# EAGLE board DRV8825_SHIELD_V1 (EAGLE 9.6.2)
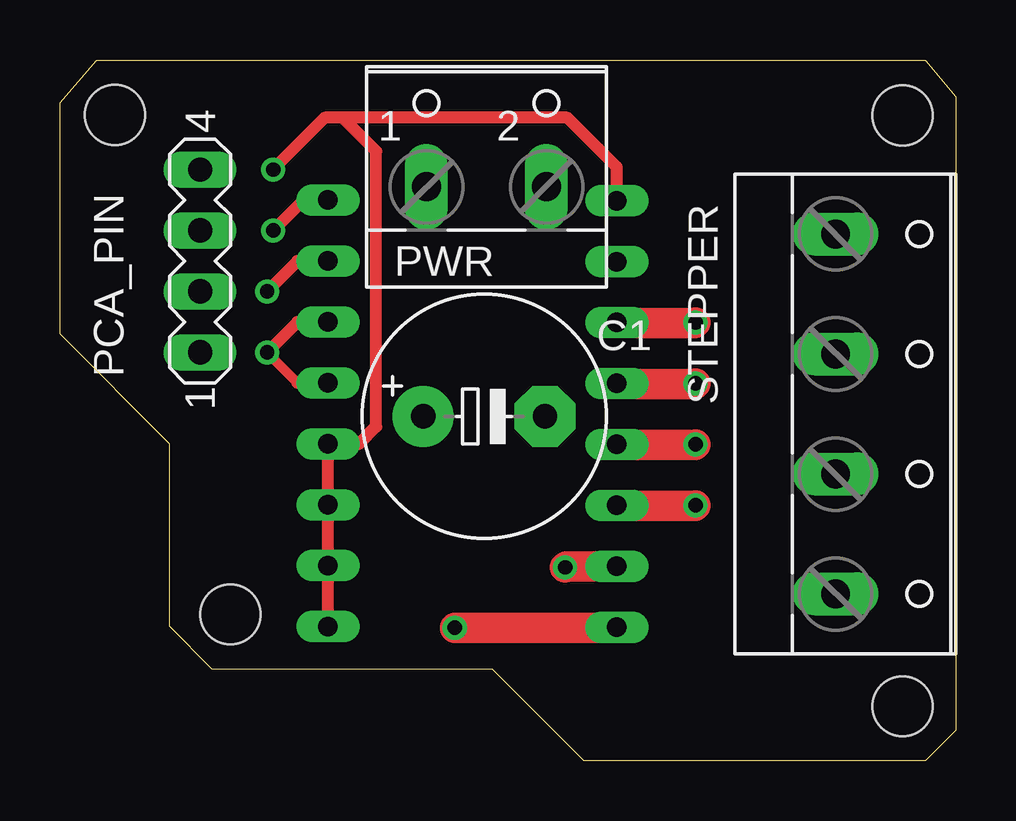
[diagram p0: board, top side]
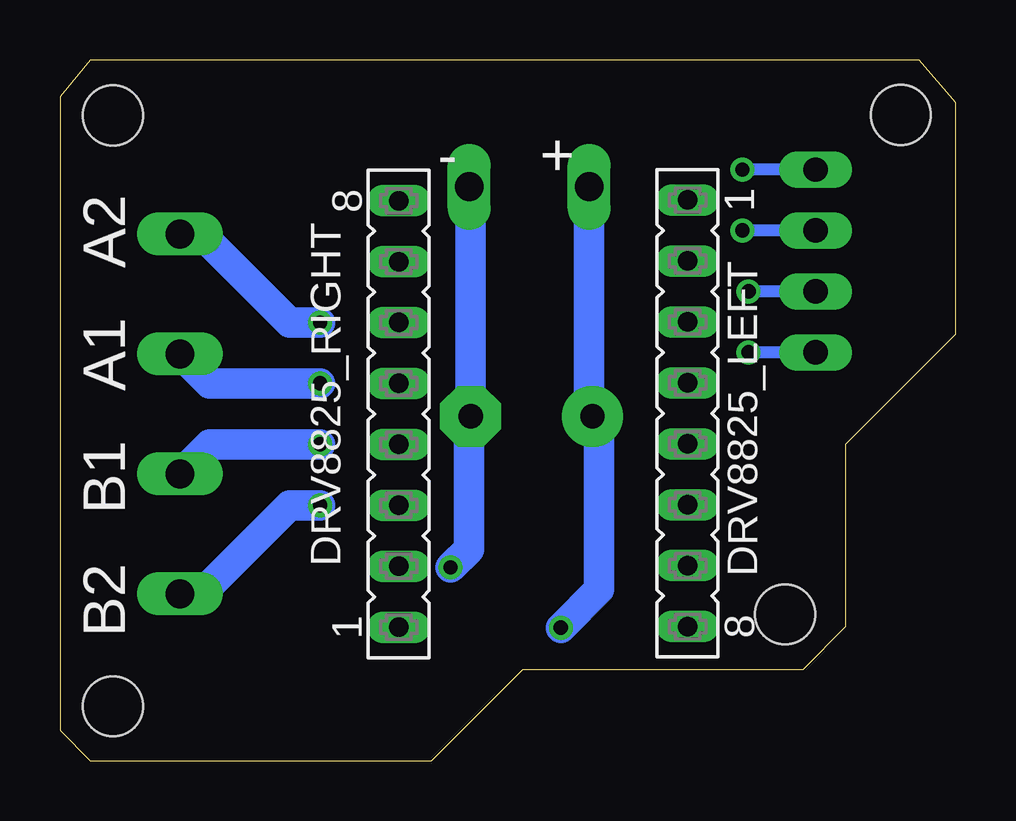
[diagram p1: board, bottom side, seen from below]

Size 37.34 x 29.21 mm. Coordinates in mm from the lower left corner, seen from the top.
Outline: 36.07,0 21.84,0 18.03,3.81 6.35,3.81 4.57,5.59 4.57,13.21 0,17.78 0,27.43 1.52,29.21 36.07,29.21 37.34,27.69 37.34,1.27 36.07,0
Copper layers (1*16): Top 0.035mm / dielectric 1.5mm / Bottom 0.035mm
Design rules "default": minimum track width 6mil, minimum drill 0.35mm, track to track 6mil, track to pad 6mil, pad to pad 6mil, via to via 6mil, smd to smd 6mil, copper to edge 40mil, drill to drill 6mil, minimum pad ring 10mil, minimum via ring 8mil, stop-mask expansion 4mil, vias tented up to drill 0mil, thermal gap 10mil
Holes 2.5 mm at 35.13,26.9 2.29,26.92 7.11,6.1 35.13,2.26

## Footprints (pad centres in the part's own frame; a part is rotated, then mirrored left to right if it is on the bottom)
E5-10,5 = drill 1.016 pad 2.54: + -2.54,0 | drill 1.016 pad 2.54 octagon: - 2.54,0
FE08 = drill 0.813 long: 1 -8.89,0; 2 -6.35,0; 3 -3.81,0; 4 -1.27,0; 5 1.27,0; 6 3.81,0; 7 6.35,0; 8 8.89,0
MA04-1 = drill 1.016 long: 1 -3.81,0; 2 -1.27,0; 3 1.27,0; 4 3.81,0
W237-102 = drill 1.194 long: 1 -2.5,-1.27; 2 2.5,-1.27
W237-4 = drill 1.194 long: 1 -7.5,-1.27; 2 -2.5,-1.27; 3 2.5,-1.27; 4 7.5,-1.27

## Placement (x,y rotation side)
C1  100uF-63V  [E5-10,5]  17.68,14.35 0 top
DRV8825_LEFT  [FE08]  11.18,14.48 270 bottom
DRV8825_RIGHT  [FE08]  23.22,14.45 90 bottom
PCA_PIN  [MA04-1]  5.84,20.83 90 top
PWR  [W237-102]  17.78,25.2 0 top
STEPPER  [W237-4]  33.6,14.45 270 top

## Library data of the parts
C1 = rcl; SPICEPREFIX: C
DRV8825_LEFT DRV8825_RIGHT = con-lsta; OC_FARNELL: unknown; OC_NEWARK: unknown
PCA_PIN = con-lstb; OC_FARNELL: unknown; OC_NEWARK: unknown
PWR = con-wago-500; MPN: 237-102; OC_FARNELL: unknown; OC_NEWARK: 70K9898
STEPPER = con-wago-500; OC_FARNELL: unknown; OC_NEWARK: unknown

## Nets
N$1: DRV8825_RIGHT.3 STEPPER.4
N$2: DRV8825_RIGHT.4 STEPPER.3
N$3: DRV8825_LEFT.2 PCA_PIN.2
N$4: DRV8825_LEFT.1 PCA_PIN.3
N$5: C1.+ DRV8825_RIGHT.1 PWR.1
N$6: C1.- DRV8825_RIGHT.2 PWR.2
N$8: DRV8825_LEFT.3 DRV8825_LEFT.4 PCA_PIN.1
N$9: DRV8825_RIGHT.5 STEPPER.2
N$10: DRV8825_RIGHT.6 STEPPER.1
N$11: DRV8825_LEFT.5 DRV8825_LEFT.6 DRV8825_LEFT.7 DRV8825_LEFT.8 DRV8825_RIGHT.8 PCA_PIN.4

## Tracks (layer width: path | path; a pad name or v marks a point on that pad's centre or on a via)
N$1  (via drill 0.6)
  Top 1.27: v26.49,10.64 26.47,10.62 23.24,10.62 DRV8825_RIGHT.3
  Bottom 1.27: STEPPER.4 31.45,6.95 27.76,10.64 v26.49,10.64
N$2  (via drill 0.6)
  Top 1.27: v26.49,13.18 26.47,13.16 23.24,13.16 DRV8825_RIGHT.4
  Bottom 1.27: STEPPER.3 31.1,13.18 v26.49,13.18
N$3  (via drill 0.6)
  Top 0.406: 9.91,20.83 DRV8825_LEFT.2
  Top 0.508: v8.64,19.56 9.91,20.83
  Bottom 0.508: PCA_PIN.2 v8.64,19.56
N$4  (via drill 0.6)
  Top 0.508: DRV8825_LEFT.1 10.16,23.37 v8.89,22.1
  Bottom 0.508: PCA_PIN.3 v8.89,22.1
N$5  (via drill 0.6)
  Top 1.27: DRV8825_RIGHT.1 23.19,5.54 v16.46,5.54
  Bottom 1.27: PWR.1 15.29,23.92 15.29,14.5 C1.+ 14.86,14.07 14.86,7.14 v16.46,5.54
N$6  (via drill 0.6)
  Top 0.152: PWR.2 20.32,23.89
  Top 1.27: DRV8825_RIGHT.2 21.11,8.1 v21.06,8.05
  Bottom 1.27: PWR.2 20.22,23.87 C1.- 20.22,13.59 20.3,13.51 20.3,8.81 v21.06,8.05
N$8  (via drill 0.6)
  Top 0.406: 9.91,15.75 v8.64,17.02
  Top 0.508: v8.64,17.02 9.91,18.29 DRV8825_LEFT.3 | DRV8825_LEFT.4 9.91,15.75
  Bottom 0.508: PCA_PIN.1 v8.64,17.02
N$9  (via drill 0.6)
  Top 1.27: v26.49,15.72 26.47,15.7 23.24,15.7 DRV8825_RIGHT.5
  Bottom 1.27: STEPPER.2 31.1,15.72 v26.49,15.72
N$10  (via drill 0.6)
  Top 1.27: v26.49,18.26 26.47,18.24 23.24,18.24 DRV8825_RIGHT.6
  Bottom 1.27: STEPPER.1 31.45,21.95 27.76,18.26 v26.49,18.26
N$11  (via drill 0.6)
  Top 0.508: DRV8825_RIGHT.8 23.22,24.74 21.16,26.8 11.02,26.8 8.89,24.66 v8.89,24.64 | 11.91,26.67 13.18,25.4 13.18,13.92 12.47,13.21 DRV8825_LEFT.5 DRV8825_LEFT.6 DRV8825_LEFT.7 DRV8825_LEFT.8
  Bottom 0.508: PCA_PIN.4 v8.89,24.64

## Text on the board
bPlace: - + | B2 B1 A1 A2
Measures: VCC STEP DIR GND